# EAGLE board PaprControl v0.20 (EAGLE 9.6.2)
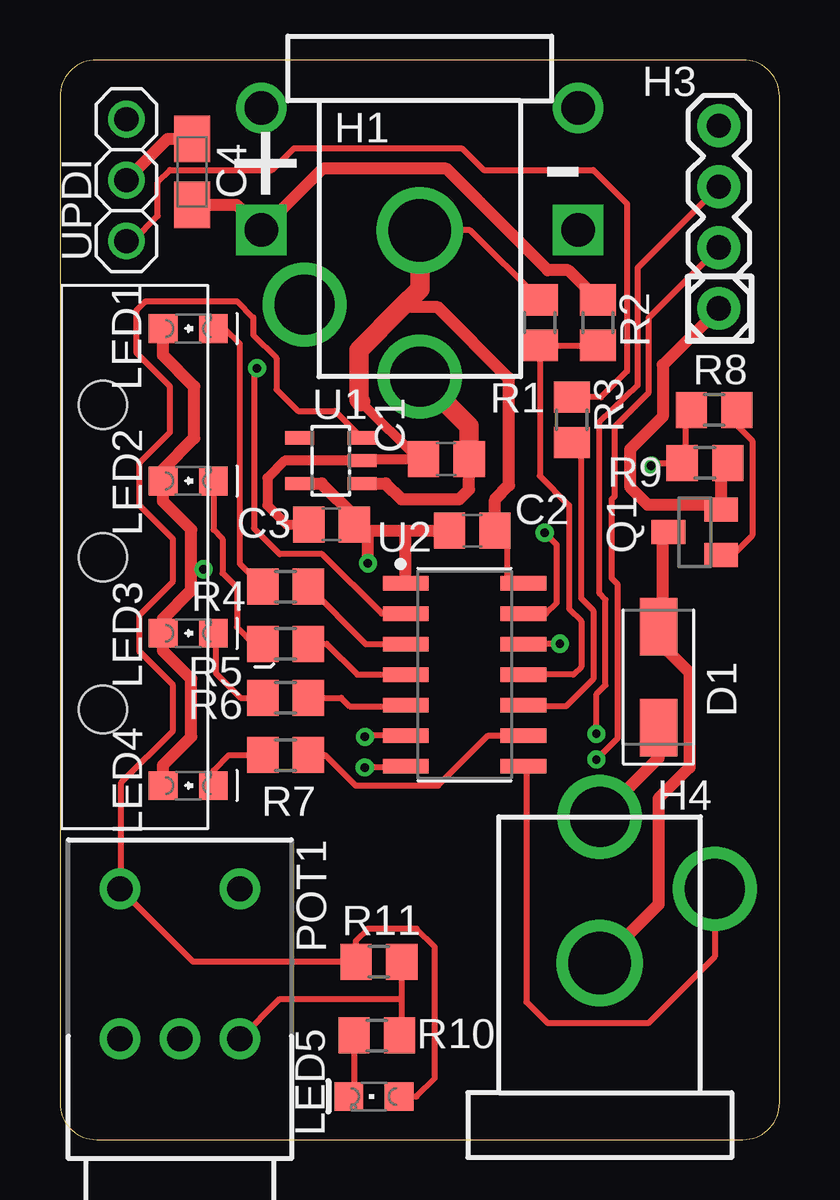
[diagram p0: board, top side]
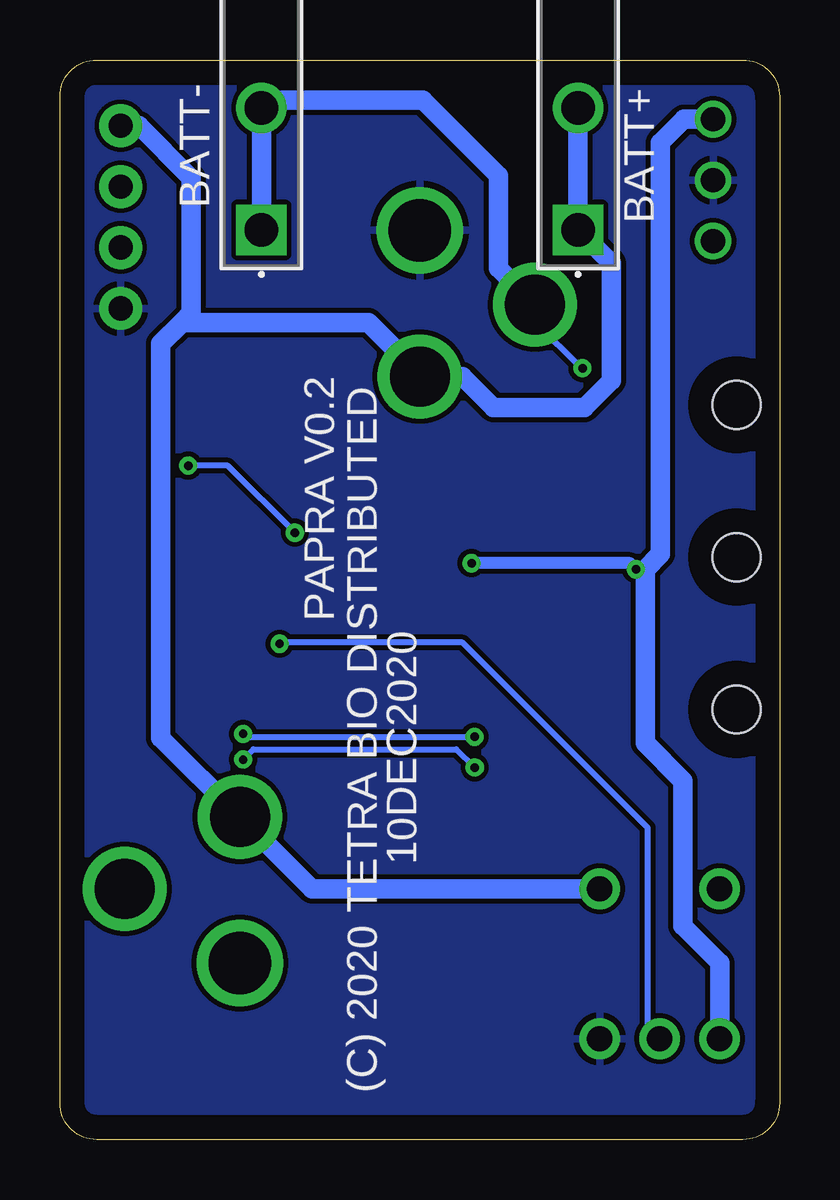
[diagram p1: board, bottom side, seen from below]

Size 30 x 45 mm. Coordinates in mm from the lower left corner, seen from the top.
Outline: 1.52,0 28.48,0 arc90 30,1.52 30,43.48 arc90 28.48,45 1.52,45 arc90 0,43.48 0,1.52 arc90 1.52,0
Copper layers (1*16): Top 0.035mm / dielectric 0.15mm / Bottom 0.035mm
Design rules "JLCPCB 2 Layer": minimum track width 6mil, minimum drill 0.35mm, track to track 6mil, track to pad 6mil, pad to pad 6mil, via to via 6mil, smd to smd 6mil, copper to edge 40mil, drill to drill 6mil, minimum pad ring 10mil, minimum via ring 8mil, stop-mask expansion 4mil, vias tented up to drill 0mil, thermal gap 10mil
Net classes: 0 default: width 0.254 mm, clearance 0.203 mm; 1 RAIL: width 0.508 mm, clearance 0.254 mm

## Footprints (pad centres in the part's own frame; a part is rotated, then mirrored left to right if it is on the bottom)
TE63952-1 = drill 1.397 pad 1.905 square: 1 -2.54,0 | drill 1.397 pad 1.905: 2 2.54,0
C0805 = smd 1.3 x 1.5: 1 -0.95,0; 2 0.95,0
A/3216-18R = smd 1.95 x 1.5: + 1.375,0; - -1.375,0
DIOM5226X290N = smd 2.392 x 1.565: 1 -2.108,0; 2 2.108,0
DCJACK-PJ-066A = drill 2.6: GND 0,8.1 | drill 2.5: GNDBREAK 4.8,11.2; PWR 0,14.2
1X04-BIG = drill 1.016 pad 1.778: 1 0,0; 2 2.54,0; 3 5.08,0; 4 7.62,0
CHIPLED_0805 = smd 1.2 x 1.2: A 0,-1.05; C 0,1.05
DIALIGHT_5151020F_/LEDS = hole 2: 0,0; 6.35,0; -6.35,0
P091S-FC20BR = drill 1.05 pad 1.7: 1 -5,-2.5; 2 -5,0; 3 -5,2.5; COM -11.25,-2.5; NO -11.25,2.5
SOT23 = smd 1 x 1.4: 1 -0.95,-1.1; 2 0.95,-1.1; 3 0,1.1
R0805 = smd 1.3 x 1.5: 1 -0.95,0; 2 0.95,0
SOT25 = smd 0.55 x 1.2: 1 -0.95,-1.3; 2 0,-1.3; 3 0.95,-1.3; 4 0.95,1.3; 5 -0.95,1.3
SOIC127P600X144-14 = smd 1.901 x 0.599: 1 -2.455,3.81; 2 -2.455,2.54; 3 -2.455,1.27; 4 -2.455,0; 5 -2.455,-1.27; 6 -2.455,-2.54; 7 -2.455,-3.81; 8 2.455,-3.81; 9 2.455,-2.54; 10 2.455,-1.27; 11 2.455,0; 12 2.455,1.27; 13 2.455,2.54; 14 2.455,3.81
1X03 = drill 1.016: 1 -2.54,0; 2 0,0; 3 2.54,0

## Placement (x,y rotation side)
BATT+  TE63952-1  [TE63952-1]  8.4,40.46 90 bottom
BATT-  TE63952-1  [TE63952-1]  21.6,40.46 90 bottom
C1  1uF CL21B105KBFNNNE (C28323)  [C0805]  16.11,28.36 180 top
C2  .1uF CL21B104KBFNNNE (C49678 )  [C0805]  17.19,25.38 0 top
C3  1uF CL21B105KBFNNNE (C28323)  [C0805]  11.32,25.64 180 top
C4  10uF TAJA106K016RNJ (C7171)  [A/3216-18R]  5.51,40.34 270 top
D1  SS34 (C8678)  [DIOM5226X290N]  24.95,19.27 90 top
H1  M-CUI-PJ-066A  [DCJACK-PJ-066A]  15,46 180 top
H3  1X4-BIG  [1X04-BIG]  27.47,34.64 90 top
H4  M-CUI-PJ-066A  [DCJACK-PJ-066A]  22.5,-0.75 0 top
LED1  NCD0805R1 (C84256)  [CHIPLED_0805]  5.35,33.8 270 top
LED2  NCD0805R1 (C84256)  [CHIPLED_0805]  5.35,27.45 270 top
LED3  NCD0805R1 (C84256)  [CHIPLED_0805]  5.35,21.1 270 top
LED4  NCD0805R1 (C84256)  [CHIPLED_0805]  5.35,14.75 270 top
LED5  NCD0805R1 (C84256)  [CHIPLED_0805]  13.09,1.79 90 top
LP1  DIALIGHT_LIGHTPIPE  [DIALIGHT_5151020F_/LEDS]  1.79,24.28 270 top
POT1  P091S-FC20BR  [P091S-FC20BR]  5,-0.8 270 top
Q1  AO3400A (C20917)  [SOT23]  26.46,25.32 90 top
R1  10K 0805W8F1002T5E (C17414)  [R0805]  20,34.05 270 top
R2  18K 0805W8F1802T5E (C17506)  [R0805]  22.43,34.05 90 top
R3  4.7K 0805W8F4701T5E (C17673)  [R0805]  21.34,30 90 top
R4  330 0805W8F3300T5E (C17630)  [R0805]  9.41,23.04 0 top
R5  330 0805W8F3300T5E (C17630)  [R0805]  9.41,20.66 0 top
R6  330 0805W8F3300T5E (C17630)  [R0805]  9.41,18.41 0 top
R7  330 0805W8F3300T5E (C17630)  [R0805]  9.41,16.03 0 top
R8  47R 0805W8F470JT5E (C17714)  [R0805]  27.27,30.41 180 top
R9  10K 0805W8F1002T5E (C17414)  [R0805]  26.89,28.21 180 top
R10  1K2 0805W8F1201T5E (C17379)  [R0805]  13.21,4.33 0 top
R11  10K 0805W8F1002T5E (C17414)  [R0805]  13.3,7.41 180 top
U1  LP2985-50DBVR (C74511)  [SOT25]  11.29,28.3 90 top
U2  ATTINYX04SOIC14  [SOIC127P600X144-14]  16.87,19.38 0 top
UPDI  NP  [1X03]  2.77,39.99 90 top

## Library data of the parts
BATT+ BATT- H1 H4 LP1 POT1 U2 = PC-LIB
C1-C4 = rcl; SPICEPREFIX: C
D1 = Diode; CATEGORY: Diode; SUB-CATEGORY: Rectifier; VALUE: DIODE
H3 UPDI = adafruit
LED1-LED5 = led
Q1 = Transistor; CATEGORY: Transistor; DESCRIPTION: MOSFET N-CH 100V 0.17A SOT-23; DRAIN_CURRENT: 170mA; MANUFACTURER: ON Semiconductor; MPN: BSS123L; OPERATING_TEMP: -55°C ~ 150°C; PART_STATUS: Active; ROHS_COMPLIANT: Yes; SUB-CATEGORY: MOSFET; THERMALLOSS: 360mW; TYPE: N-Channel; VALUE: BSS123
R1-R11 = rcl; SPICEPREFIX: R
U1 = v-reg

## Nets
+5V [RAIL]: C2.1 C3.1 LED1.A LED2.A LED3.A LED4.A POT1.1 U1.5 U2.1 UPDI.3
+12V [RAIL]: BATT+.1 BATT+.2 C1.1 C4.+ D1.1 H1.PWR H3.4 H4.PWR POT1.NO R2.2 U1.1
ADC-BAT: R1.2 R2.1 U2.11
EXPANSIONRX: H3.3 U2.6
EXPANSIONTX: H3.2 U2.7
FAN-GND [RAIL]: D1.2 H4.GND Q1.3
FAN-PWM: R8.2 R9.2 U2.13
FAN-SENSE: H4.GNDBREAK U2.8
FETGATE: Q1.1 R8.1
GND: C1.2 C2.2 C3.2 C4.- H1.GND H3.1 POT1.3 Q1.2 R1.1 R9.1 R10.2 R11.1 U1.2 U2.14 UPDI.2
GND-SWITCH: BATT-.1 BATT-.2 H1.GNDBREAK U2.2
LED1: R4.2 U2.3
LED1-R: LED1.C R4.1
LED2: R5.2 U2.4
LED2-R: LED2.C R5.1
LED3: R6.2 U2.5
LED3-R: LED3.C R6.1
LED4: R7.2 U2.9
LED4-R: LED4.C R7.1
LED5-R: LED5.C R10.1
POT-ADC: POT1.2 U2.12
PWRON: LED5.A POT1.COM R11.2 U1.3
UPDI: R3.2 UPDI.1
UPDI/RST: R3.1 U2.10

## Tracks (layer width: path | path; a pad name or v marks a point on that pad's centre or on a via)
+5V  (via drill 0.35)
  Top 0.508: C3.1 12.54,25.38 14.49,25.38 | 14.49,25.38 C2.1 | U2.1 14.41,25.3 14.49,25.38 | U1.5 10.91,27.35 12.27,25.99 C3.1 | LED4.A 4.3,15.61 5.47,16.79 5.47,19.2 4.3,20.38 LED3.A 4.3,21.7 5.47,22.88 5.47,23.77 | 5.47,23.77 5.47,25.42 4.3,26.6 LED2.A 4.3,27.93 5.6,29.23 5.6,31.39 4.3,32.69 LED1.A | v12.84,24.02 12.84,25.08 C3.1 | v5.98,23.77 5.47,23.77
  Bottom 0.508: 5.6,23.77 v5.98,23.77 6.24,24.02 v12.84,24.02
  Bottom 0.813: POT1.1 2.5,7.38 4.02,8.9 4.02,14.95 5.6,16.53 5.6,23.77 4.97,24.41 4.97,41.55 3.99,42.53 UPDI.3
+12V
  Top 0.508: U1.1 13.58,27.35 14.24,26.69 16.65,26.69 17.06,27.1 C1.1 | C4.+ 7.36,38.96 BATT+.1 10.94,40.46 16.12,40.46 20.34,36.24 21.19,36.24 R2.2 | D1.1 24.95,15.9 H4.PWR
  Top 0.813: H1.PWR 17.06,29.74 C1.1
  Bottom 0.813: BATT+.2 BATT+.1 7,36.52 7,31.64 8.14,30.5 11.92,30.5 13.22,31.8 H1.PWR 15,31.93 17.13,34.06 24.91,34.06 | H3.4 26.71,42.26 24.52,40.08 24.52,34.44 24.91,34.06 | 24.91,34.06 25.8,33.17 25.8,16.75 H4.PWR 19.5,10.45 POT1.NO
ADC-BAT
  Top 0.254: R2.1 R1.2 20,27.66 21.22,26.44 21.22,22.12 21.73,21.61 21.73,19.71 21.41,19.38 U2.11
EXPANSIONRX  (via drill 0.35)
  Top 0.254: v12.71,16.79 12.77,16.84 U2.6 | H3.3 24.09,36.34 24.09,31.44 22.49,29.9 22.49,22.75 22.75,22.5 22.75,18.94 22.37,18.56 v22.37,16.91
  Bottom 0.254: v12.71,16.79 22.24,16.79 v22.37,16.91
EXPANSIONTX  (via drill 0.35)
  Top 0.254: U2.7 14.36,15.52 v12.71,15.52 v12.71,15.51 | v22.37,15.84 23.26,16.73 23.26,23.14 23,23.39 23,26.69 23.13,26.82 23.13,29.71 24.55,31.14 24.55,34.26 H3.2
  Bottom 0.254: v22.37,15.84 21.94,16.27 13.47,16.27 v12.71,15.51
FAN-GND
  Top 0.508: H4.GND 24.95,9.8 24.95,14.22 26.24,15.51 26.24,19.46 24.95,20.75 D1.2 25.11,21.54 25.11,25.06 Q1.3
FAN-PWM  (via drill 0.35)
  Top 0.254: R8.2 26.07,30.16 26.07,28.33 R9.2 24.77,28.21 v24.65,28.09 | U2.13 20.26,21.92 20.71,22.37 20.71,24.79 v20.21,25.29
  Bottom 0.254: v20.21,25.29 23,28.09 v24.65,28.09
FAN-SENSE
  Top 0.254: H4.GNDBREAK 27.3,7.62 24.52,4.85 20.33,4.85 19.45,5.74 19.45,15.45 U2.8
FETGATE
  Top 0.254: R8.1 28.22,29.77 28.86,29.14 28.86,25.17 28.06,24.37 Q1.1
GND
  Top 0.254: R1.1 17.1,37.9 H1.GND | R11.1 14.25,5.86 | 14.25,5.86 14.25,4.42 R10.2 | POT1.3 9.16,5.86 14.25,5.86 | U2.14 18.69,23.19 18.64,23.24 18.64,24.87 C2.2
  Top 0.406: 12.54,30.77 14.95,28.36 | 14.95,28.36 C1.2 | 14.95,28.36 12.65,28.36 U1.2 9.37,28.3 8.65,27.58 8.65,26.44 9.44,25.64 C3.2
  Top 0.508: UPDI.2 4.49,41.71 C4.- | R9.1 27.56,27.93 Q1.2 27.38,26.45 24.51,26.45 23.76,27.2 23.76,28.76 25.13,30.13 25.13,32.29 27.47,34.62 H3.1 | C2.2 18.14,26.68 18.73,27.27 18.73,31.73 15.76,34.69 14.24,34.69
  Top 0.813: H1.GND 15,35.45 14.24,34.69 12.46,32.91 12.46,30.85 12.54,30.77
  pour Bottom: 31,46.5 -1,46.5 -1,-1.5 31,-1.5
GND-SWITCH  (via drill 0.35)
  Top 0.254: U2.2 13.42,21.92 10.94,24.41 9.16,24.41 8.09,25.47 8.09,32.03 v8.21,32.15
  Bottom 0.254: H1.GNDBREAK 10.2,34.08 8.27,32.15 v8.21,32.15
  Bottom 0.813: BATT-.1 BATT-.2 21.27,43.33 14.87,43.33 11.72,40.18 11.72,36.32 H1.GNDBREAK
LED1
  Top 0.254: R4.2 12.75,20.65 U2.3
LED1-R
  Top 0.254: R4.1 7.51,23.99 7.51,33.17 6.87,33.8 LED1.C
LED2
  Top 0.254: R5.2 11.12,20.66 12.4,19.38 U2.4
LED2-R
  Top 0.254: LED2.C 6.4,25.42 6.78,25.04 6.78,23.61 7.38,23.01 7.38,21.36 8.07,20.66 R5.1
LED3
  Top 0.254: R6.2 11.73,18.41 12.08,18.05 14.36,18.05 U2.5
LED3-R
  Top 0.254: LED3.C 6.49,21.01 6.49,19.45 7.54,18.41 R6.1
LED4
  Top 0.254: R7.2 11.06,16.03 12.33,14.75 15.76,14.75 17.85,16.84 U2.9
LED4-R
  Top 0.254: LED4.C 6.4,15.37 7.06,16.03 R7.1
LED5-R
  Top 0.254: R10.1 12.26,2.01 LED5.C
POT-ADC  (via drill 0.35)
  Top 0.254: v20.84,20.67 20.7,20.65 U2.12
  Bottom 0.254: POT1.2 5.51,4.71 5.51,13.01 13.22,20.72 20.84,20.72 v20.84,20.67
PWRON
  Top 0.254: LED5.A 14.87,1.8 15.63,2.56 15.63,8.02 14.87,8.78 12.84,8.78 12.33,8.28 12.33,7.42 R11.2 5.54,7.41 POT1.COM 2.55,10.5 2.55,14.88 4.71,17.04 4.71,18.94 3.32,20.34 3.32,21.86 4.71,23.26 4.71,25.04 3.32,26.44 3.32,28.21 4.59,29.48 4.59,31.39 3.19,32.79 3.19,34.56 3.57,34.95 7.38,34.95 8.06,34.27 8.06,33.53 9.03,32.56 9.03,31.26 9.92,30.37 11.46,30.37 U1.3
UPDI
  Top 0.254: UPDI.1 3.02,37.45 4.08,38.5 4.08,39.9 4.59,40.41 8.84,40.41 9.75,41.32 16.76,41.32 17.67,40.41 22.24,40.41 23.64,39.01 23.64,32.02 22.56,30.95 R3.2
UPDI/RST
  Top 0.254: R3.1 21.72,28.66 21.72,22.57 22.23,22.06 22.23,19.19 21.1,18.05 19.38,18.05 U2.10

## Text on the board
bPlace: (C) 2020 TETRA BIO DISTRIBUTED | PAPRA V0.2 | 10DEC2020
tNames: + | -